# Altium PCB msp430最小系统.PcbDoc (part 2 of 3)
Units mm, origin at the board's own origin, x right, y up, seen from the top; angles counter-clockwise.
Board outline 152.4 x 101.6 mm, 2 copper layers (Top Layer, Bottom Layer); 67 components, 101 nets, 330 pads, 20 vias.
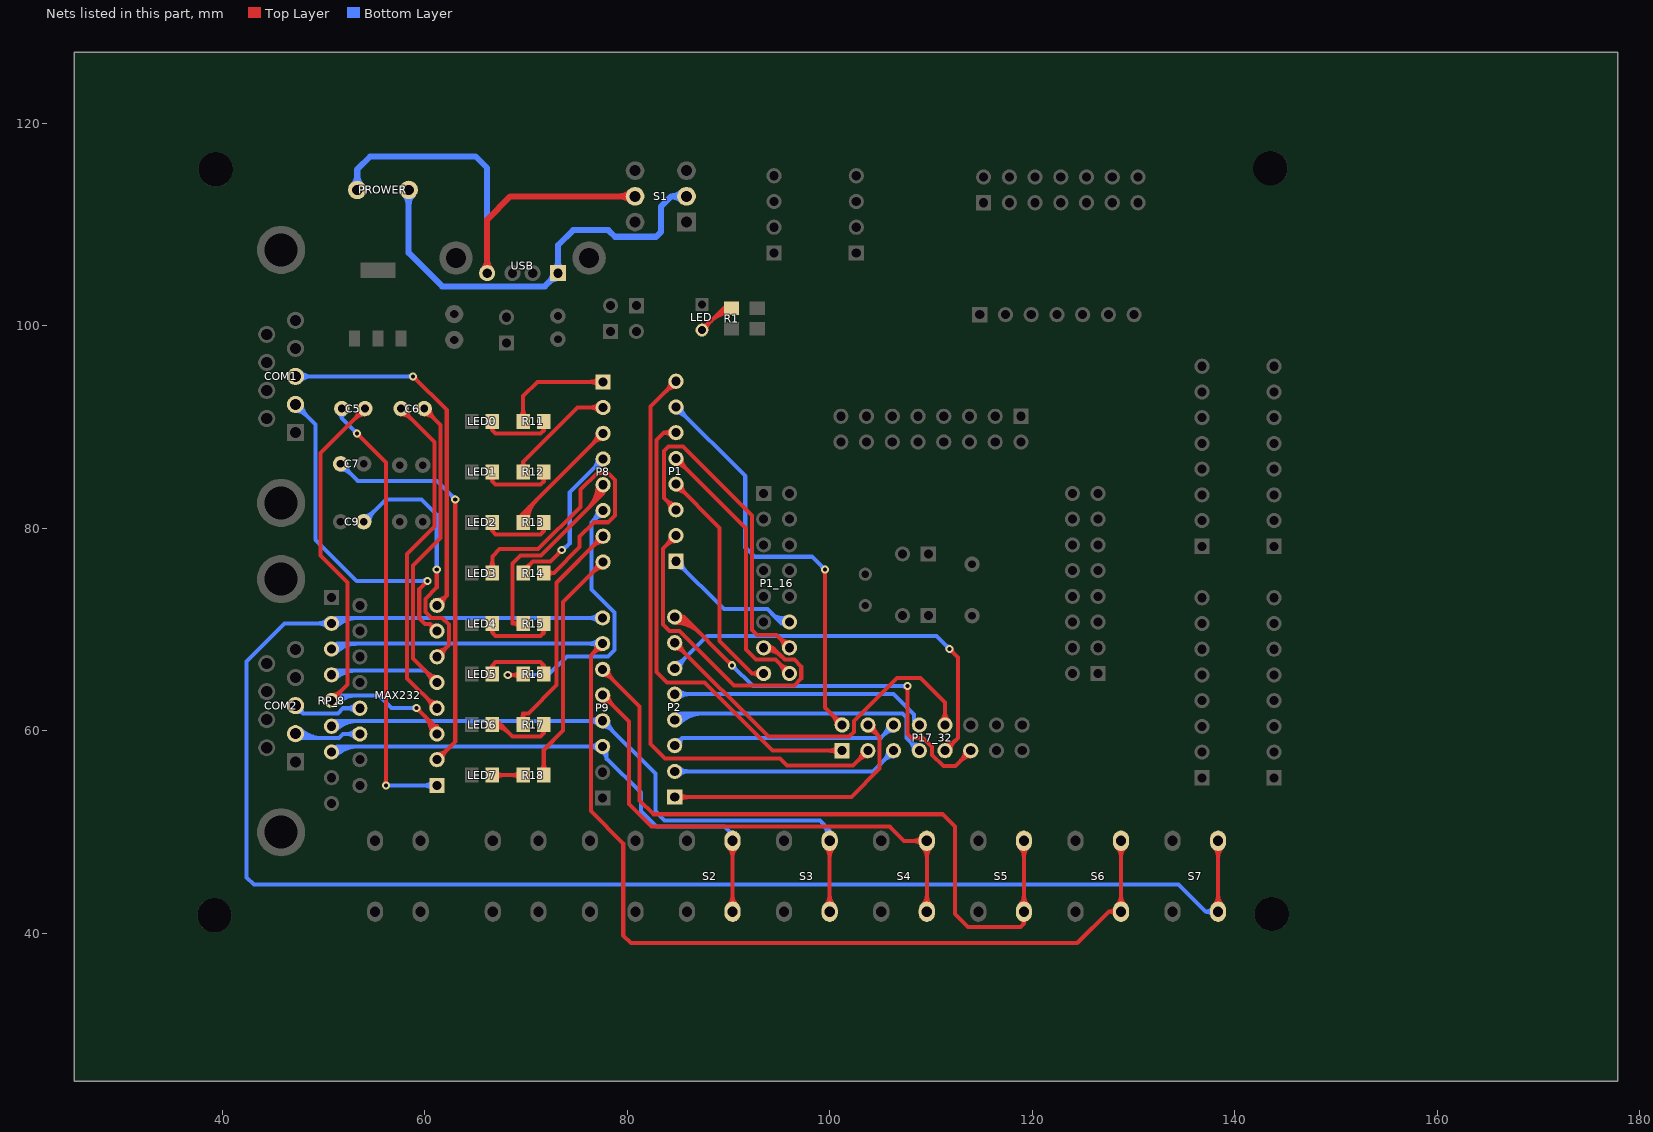
[diagram p2: the nets of this part, all layers, seen from the top]

## Via types
v1: diameter 0.8, hole 0.4, Top Layer to Bottom Layer, 20 vias

## Nets (pads, with @x,y where several pads share a name; then routed paths per layer and width w, separated by ;. In a path a pad name is that pad's centre, name@x,y a point inside that pad or via, vN(x,y) a via of type N, cw(c..) or ccw(c..) an arc to the next point about the centre after c; other vN are vias at no path point) (continued)
Net3_2: P9.3 RP_8.7 S2.2 | length 83.6
  Top Layer w0.4: S2.2@90.401,42.141 S2.2@90.401,49.141 ; 90.401,43.79 cw(c88.952,43.79) 89.976,42.765 ccw(c88.952,43.79) 90.401,43.79 ; 90.401,43.79 ccw(c91.849,43.79) 90.825,42.765 cw(c91.849,43.79) 90.401,43.79 ; 90.401,47.492 cw(c91.849,47.492) 90.825,48.517 ccw(c91.849,47.492) 90.401,47.492 ; 90.401,47.492 ccw(c88.952,47.492) 89.976,48.517 cw(c88.952,47.492) 90.401,47.492
  Bottom Layer w0.4: RP_8.7@50.8,57.912 51.339,58.451 ; S2.2@90.401,49.141 90.401,49.733 89.593,50.541 82.865,50.541 81.336,52.07 81.336,53.903 77.953,57.286 77.953,58.451 P9.3@77.574,58.451 51.339,58.451 ; 51.339,58.451 cw(c51.16,58.63) 51.046,58.404 ccw(c51.16,58.63) 51.339,58.451 ; 51.339,58.451 ccw(c51.518,58.272) 51.292,58.158 cw(c51.518,58.272) 51.339,58.451 ; 76.246,58.451 cw(c76.246,57.123) 77.185,58.062 ccw(c76.246,57.123) 76.246,58.451 ; 76.246,58.451 ccw(c76.246,59.779) 77.185,58.84 cw(c76.246,59.779) 76.246,58.451 ; RP_8.7@50.623,58.089 cw(c51.498,57.214) 51.498,58.451 ccw(c51.498,57.214) RP_8.7@50.623,58.089 ; RP_8.7@50.906,57.806 cw(c52.463,56.249) 52.463,58.451 ccw(c52.463,56.249) RP_8.7@50.906,57.806 ; RP_8.7@51.189,57.523 cw(c53.429,55.283) 53.429,58.451 ccw(c53.429,55.283) RP_8.7@51.189,57.523 ; P9.3@77.426,57.921 cw(c77.231,57.226) 77.953,57.226 ccw(c77.231,57.226) P9.3@77.426,57.921 ; P9.3@77.534,58.307 cw(c77.379,57.754) 77.953,57.754 ccw(c77.379,57.754) P9.3@77.534,58.307 ; 89.944,50.19 cw(c89.285,49.531) 90.204,49.375 ccw(c89.285,49.531) 89.944,50.19 ; 90.046,50.088 ccw(c90.401,50.443) 90.401,49.941 cw(c90.401,50.443) 90.046,50.088
Net4_2: P9.4 RP_8.6 S3.2 | length 100.2
  Top Layer w0.4: S3.2@99.989,42.141 S3.2@99.989,49.141 ; 99.989,43.79 cw(c98.541,43.79) 99.565,42.765 ccw(c98.541,43.79) 99.989,43.79 ; 99.989,43.79 ccw(c101.438,43.79) 100.413,42.765 cw(c101.438,43.79) 99.989,43.79 ; 99.989,47.492 cw(c101.438,47.492) 100.413,48.517 ccw(c101.438,47.492) 99.989,47.492 ; 99.989,47.492 ccw(c98.541,47.492) 99.565,48.517 cw(c98.541,47.492) 99.989,47.492
  Bottom Layer w0.4: RP_8.6@50.8,60.452 51.339,60.991 ; S3.2@99.989,49.141 99.989,50.165 ; 51.339,60.991 cw(c51.16,61.17) 51.046,60.944 ccw(c51.16,61.17) 51.339,60.991 ; 51.339,60.991 ccw(c51.518,60.812) 51.292,60.698 cw(c51.518,60.812) 51.339,60.991 ; 51.339,60.991 P9.4@77.574,60.991 82.768,55.797 82.768,52.07 83.697,51.141 99.013,51.141 99.989,50.165 ; 76.246,60.991 cw(c76.246,59.663) 77.185,60.602 ccw(c76.246,59.663) 76.246,60.991 ; 76.246,60.991 ccw(c76.246,62.319) 77.185,61.38 cw(c76.246,62.319) 76.246,60.991 ; 78.513,60.052 cw(c79.452,60.991) 78.124,60.991 ccw(c79.452,60.991) 78.513,60.052 ; 78.513,60.052 ccw(c77.574,59.113) 77.574,60.441 cw(c77.574,59.113) 78.513,60.052 ; 99.989,50.165 cw(c99.723,50.165) 99.805,49.912 ccw(c99.723,50.165) 99.989,50.165 ; 99.989,50.165 ccw(c100.255,50.165) 100.173,49.912 cw(c100.255,50.165) 99.989,50.165 ; RP_8.6@50.623,60.629 cw(c51.498,59.754) 51.498,60.991 ccw(c51.498,59.754) RP_8.6@50.623,60.629 ; RP_8.6@50.906,60.346 cw(c52.463,58.789) 52.463,60.991 ccw(c52.463,58.789) RP_8.6@50.906,60.346 ; RP_8.6@51.189,60.063 cw(c53.429,57.823) 53.429,60.991 ccw(c53.429,57.823) RP_8.6@51.189,60.063 ; 99.21,50.944 cw(c97.793,49.527) 99.79,49.358 ccw(c97.793,49.527) 99.21,50.944 ; 99.819,50.335 cw(c98.915,49.432) 100.188,49.324 ccw(c98.915,49.432) 99.819,50.335
Net5_2: P9.5 S4.2 | length 67.6
  Top Layer w0.4: P9.5@77.574,63.531 80.162,60.943 80.162,52.757 82.374,50.546 105.918,50.546 107.34,49.124 S4.2@109.578,49.124 ; S4.2@109.578,42.141 S4.2@109.578,49.124 ; S4.2@109.578,49.141 S4.2@109.578,49.124 ; 78.513,62.592 cw(c79.452,63.531) 78.124,63.531 ccw(c79.452,63.531) 78.513,62.592 ; 78.513,62.592 ccw(c77.574,61.653) 77.574,62.981 cw(c77.574,61.653) 78.513,62.592 ; 109.578,43.79 cw(c108.129,43.79) 109.153,42.765 ccw(c108.129,43.79) 109.578,43.79 ; 109.578,43.79 ccw(c111.026,43.79) 110.002,42.765 cw(c111.026,43.79) 109.578,43.79 ; 109.578,47.492 cw(c111.026,47.492) 110.002,48.517 ccw(c111.026,47.492) 109.578,47.492 ; 109.578,47.492 ccw(c108.129,47.492) 109.153,48.517 cw(c108.129,47.492) 109.578,47.492 ; 108.087,49.124 ccw(c108.087,50.632) 109.153,49.565 cw(c108.087,50.632) 108.087,49.124 ; 108.171,49.124 cw(c108.171,47.735) 109.153,48.717 ccw(c108.171,47.735) 108.171,49.124
Net6_2: P9.6 S5.2 | length 86.4
  Top Layer w0.4: P9.6@77.574,66.071 81.229,62.416 81.229,53.137 82.601,51.765 111.15,51.765 112.37,50.546 112.37,41.935 113.665,40.64 118.849,40.64 119.166,40.957 ; S5.2@119.166,49.141 S5.2@119.166,42.141 119.166,40.957 ; 78.513,65.132 cw(c79.452,66.071) 78.124,66.071 ccw(c79.452,66.071) 78.513,65.132 ; 78.513,65.132 ccw(c77.574,64.193) 77.574,65.521 cw(c77.574,64.193) 78.513,65.132 ; 119.166,40.958 cw(c119.672,40.958) 119.441,41.407 ccw(c119.672,40.958) 119.166,40.958 ; 119.166,40.958 ccw(c118.66,40.958) 118.892,41.407 cw(c118.66,40.958) 119.166,40.958 ; 119.166,43.79 cw(c117.718,43.79) 118.742,42.765 ccw(c117.718,43.79) 119.166,43.79 ; 119.166,43.79 ccw(c120.615,43.79) 119.59,42.765 cw(c120.615,43.79) 119.166,43.79 ; 119.166,47.492 cw(c120.615,47.492) 119.59,48.517 ccw(c120.615,47.492) 119.166,47.492 ; 119.166,47.492 ccw(c117.718,47.492) 118.742,48.517 cw(c117.718,47.492) 119.166,47.492
Net7_2: P9.7 RP_8.3 S6.2 | length 147.8
  Top Layer w0.4: P9.7@77.574,68.611 76.422,67.459 76.422,52.07 79.604,48.888 79.604,39.802 80.366,39.04 124.435,39.04 127.559,42.164 ; S6.2@128.755,42.141 S6.2@128.755,42.164 ; S6.2@128.755,49.141 S6.2@128.755,42.164 ; 76.635,67.672 cw(c77.574,66.733) 77.574,68.061 ccw(c77.574,66.733) 76.635,67.672 ; 76.635,67.672 ccw(c75.696,68.611) 77.024,68.611 cw(c75.696,68.611) 76.635,67.672 ; 127.559,42.164 cw(c127.559,41.305) 128.263,41.797 ccw(c127.559,41.305) 127.559,42.164 ; 127.559,42.164 ccw(c127.559,43.092) 128.285,42.514 cw(c127.559,43.092) 127.559,42.164 ; 127.559,42.164 S6.2@128.755,42.164 ; 128.755,43.79 cw(c127.306,43.79) 128.33,42.765 ccw(c127.306,43.79) 128.755,43.79 ; 128.755,43.79 ccw(c130.203,43.79) 129.179,42.765 cw(c130.203,43.79) 128.755,43.79 ; 128.755,47.492 cw(c130.203,47.492) 129.179,48.517 ccw(c130.203,47.492) 128.755,47.492 ; 128.755,47.492 ccw(c127.306,47.492) 128.33,48.517 cw(c127.306,47.492) 128.755,47.492
  Bottom Layer w0.4: RP_8.3@50.8,68.072 51.339,68.611 ; P9.7@77.574,68.611 51.339,68.611 ; 51.339,68.611 cw(c51.16,68.79) 51.046,68.564 ccw(c51.16,68.79) 51.339,68.611 ; 51.339,68.611 ccw(c51.518,68.432) 51.292,68.318 cw(c51.518,68.432) 51.339,68.611 ; 76.246,68.611 cw(c76.246,67.283) 77.185,68.222 ccw(c76.246,67.283) 76.246,68.611 ; 76.246,68.611 ccw(c76.246,69.939) 77.185,69 cw(c76.246,69.939) 76.246,68.611 ; RP_8.3@50.623,68.249 cw(c51.498,67.374) 51.498,68.611 ccw(c51.498,67.374) RP_8.3@50.623,68.249 ; RP_8.3@50.906,67.966 cw(c52.463,66.409) 52.463,68.611 ccw(c52.463,66.409) RP_8.3@50.906,67.966 ; RP_8.3@51.189,67.683 cw(c53.429,65.443) 53.429,68.611 ccw(c53.429,65.443) RP_8.3@51.189,67.683
Net8_2: P9.8 RP_8.2 S7.2 | length 195.3
  Top Layer w0.4: S7.2@138.343,42.141 S7.2@138.343,49.141 ; 138.343,43.79 cw(c136.895,43.79) 137.919,42.765 ccw(c136.895,43.79) 138.343,43.79 ; 138.343,43.79 ccw(c139.792,43.79) 138.767,42.765 cw(c139.792,43.79) 138.343,43.79 ; 138.343,47.492 cw(c139.792,47.492) 138.767,48.517 ccw(c139.792,47.492) 138.343,47.492 ; 138.343,47.492 ccw(c136.895,47.492) 137.919,48.517 cw(c136.895,47.492) 138.343,47.492
  Bottom Layer w0.4: P9.8@77.574,71.151 51.339,71.151 ; S7.2@138.343,42.141 138.343,42.139 137.084,42.139 ; 49.472,70.612 cw(c49.472,69.284) 50.411,70.223 ccw(c49.472,69.284) 49.472,70.612 ; 49.472,70.612 ccw(c49.472,71.94) 50.411,71.001 cw(c49.472,71.94) 49.472,70.612 ; 51.339,71.151 cw(c51.16,71.33) 51.046,71.104 ccw(c51.16,71.33) 51.339,71.151 ; 51.339,71.151 ccw(c51.518,70.972) 51.292,70.858 cw(c51.518,70.972) 51.339,71.151 ; 51.339,71.151 RP_8.2@50.8,70.612 46.177,70.612 42.418,66.853 42.418,45.517 43.129,44.806 134.417,44.806 137.084,42.139 ; 76.246,71.151 cw(c76.246,69.823) 77.185,70.762 ccw(c76.246,69.823) 76.246,71.151 ; 76.246,71.151 ccw(c76.246,72.479) 77.185,71.54 cw(c76.246,72.479) 76.246,71.151 ; 137.084,42.139 cw(c137.084,41.113) 137.878,41.762 ccw(c137.084,41.113) 137.084,42.139 ; 137.084,42.139 ccw(c137.084,43.156) 137.876,42.518 cw(c137.084,43.156) 137.084,42.139 ; RP_8.2@50.623,70.789 cw(c51.498,69.914) 51.498,71.151 ccw(c51.498,69.914) RP_8.2@50.623,70.789 ; RP_8.2@50.906,70.506 cw(c52.463,68.949) 52.463,71.151 ccw(c52.463,68.949) RP_8.2@50.906,70.506 ; RP_8.2@51.189,70.223 cw(c53.429,67.983) 53.429,71.151 ccw(c53.429,67.983) RP_8.2@51.189,70.223
NetC5_1: C5.1 MAX232.1 | length 56.6
  Top Layer w0.4: v1(53.315,89.357) 56.159,86.512 v1(56.159,54.61) ; 53.656,89.016 cw(c53.997,89.357) 53.515,89.357 ccw(c53.997,89.357) 53.656,89.016 ; 53.656,89.016 ccw(c53.315,88.674) 53.315,89.157 cw(c53.315,88.674) 53.656,89.016 ; 56.159,55.093 cw(c55.677,55.093) 56.018,54.751 ccw(c55.677,55.093) 56.159,55.093 ; 56.159,55.093 ccw(c56.642,55.093) 56.301,54.751 cw(c56.642,55.093) 56.159,55.093
  Bottom Layer w0.4: C5.1@51.816,91.821 51.816,90.856 ; v1(53.315,89.357) 51.816,90.856 ; v1(56.159,54.61) MAX232.1@61.214,54.61 ; 51.816,90.856 cw(c52.364,90.856) 52.093,91.332 ccw(c52.364,90.856) 51.816,90.856 ; 51.816,90.856 ccw(c51.268,90.856) 51.539,91.332 cw(c51.268,90.856) 51.816,90.856 ; 52.973,89.699 cw(c52.632,89.357) 53.115,89.357 ccw(c52.632,89.357) 52.973,89.699 ; 52.973,89.699 ccw(c53.315,90.04) 53.315,89.557 cw(c53.315,90.04) 52.973,89.699 ; 56.642,54.61 cw(c56.642,55.093) 56.301,54.751 ccw(c56.642,55.093) 56.642,54.61 ; 56.642,54.61 ccw(c56.642,54.127) 56.301,54.469 cw(c56.642,54.127) 56.642,54.61 ; 59.886,54.61 cw(c59.886,53.282) 60.825,54.221 ccw(c59.886,53.282) 59.886,54.61 ; 59.886,54.61 ccw(c59.886,55.938) 60.825,54.999 cw(c59.886,55.938) 59.886,54.61
NetC5_2: C5.2 MAX232.3 RP_8.5 | length 77.8
  Top Layer w0.4: RP_8.5@50.8,62.992 52.368,64.56 52.368,74.632 49.708,77.292 49.708,87.427 C5.2@54.102,91.821 ; v1(59.207,62.255) 60.985,60.477 61.214,60.477 ; MAX232.3@61.214,59.69 61.214,60.477 ; 51.739,63.931 cw(c50.8,64.87) 50.8,63.542 ccw(c50.8,64.87) 51.739,63.931 ; 51.739,63.931 ccw(c52.678,62.992) 51.35,62.992 cw(c52.678,62.992) 51.739,63.931 ; 53.143,90.862 cw(c54.102,89.902) 54.102,91.259 ccw(c54.102,89.902) 53.143,90.862 ; 53.143,90.862 ccw(c52.183,91.821) 53.54,91.821 cw(c52.183,91.821) 53.143,90.862 ; 59.549,61.914 cw(c59.89,62.255) 59.407,62.255 ccw(c59.89,62.255) 59.549,61.914 ; 59.549,61.914 ccw(c59.207,61.573) 59.207,62.055 cw(c59.207,61.573) 59.549,61.914 ; 61.214,60.477 cw(c60.925,60.477) 61.025,60.206 ccw(c60.925,60.477) 61.214,60.477 ; 61.214,60.477 ccw(c61.503,60.477) 61.403,60.206 cw(c61.503,60.477) 61.214,60.477 ; 59.88,61.583 cw(c57.987,59.69) 60.664,59.69 ccw(c57.987,59.69) 59.88,61.583 ; 60.563,60.9 cw(c59.353,59.69) 61.064,59.69 ccw(c59.353,59.69) 60.563,60.9 ; 60.706,60.757 cw(c60.297,60.348) 60.767,60.011 ccw(c60.297,60.348) 60.706,60.757 ; 61.039,60.424 cw(c60.685,60.069) 61.092,59.777 ccw(c60.685,60.069) 61.039,60.424
  Bottom Layer w0.4: RP_8.5@50.8,62.992 51.308,63.5 55.499,63.5 56.744,62.255 v1(59.207,62.255) ; 58.725,62.255 cw(c58.725,61.773) 59.066,62.114 ccw(c58.725,61.773) 58.725,62.255 ; 58.725,62.255 ccw(c58.725,62.738) 59.066,62.397 cw(c58.725,62.738) 58.725,62.255 ; RP_8.5@50.623,63.169 cw(c51.423,62.369) 51.423,63.5 ccw(c51.423,62.369) RP_8.5@50.623,63.169 ; RP_8.5@50.906,62.886 cw(c52.389,61.403) 52.389,63.5 ccw(c52.389,61.403) RP_8.5@50.906,62.886 ; RP_8.5@51.189,62.603 cw(c53.354,60.438) 53.354,63.5 ccw(c53.354,60.438) RP_8.5@51.189,62.603
NetC6_1: C6.1 MAX232.4 | length 41.7
  Top Layer w0.4: C6.1@57.658,91.821 60.979,88.5 60.979,80.156 58.264,77.441 58.264,65.18 MAX232.4@61.214,62.23 ; 58.617,90.862 cw(c59.577,91.821) 58.22,91.821 ccw(c59.577,91.821) 58.617,90.862 ; 58.617,90.862 ccw(c57.658,89.902) 57.658,91.259 cw(c57.658,89.902) 58.617,90.862 ; 60.275,63.169 cw(c59.336,62.23) 60.664,62.23 ccw(c59.336,62.23) 60.275,63.169 ; 60.275,63.169 ccw(c61.214,64.108) 61.214,62.78 cw(c61.214,64.108) 60.275,63.169
NetC6_2: C6.2 MAX232.5 RP_8.4 | length 60.7
  Top Layer w0.4: C6.2@59.944,91.821 61.579,90.186 61.579,79.057 58.864,76.342 58.864,67.12 MAX232.5@61.214,64.77 ; 60.275,65.709 cw(c59.336,64.77) 60.664,64.77 ccw(c59.336,64.77) 60.275,65.709 ; 60.275,65.709 ccw(c61.214,66.648) 61.214,65.32 cw(c61.214,66.648) 60.275,65.709 ; 60.903,90.862 cw(c61.863,91.821) 60.506,91.821 ccw(c61.863,91.821) 60.903,90.862 ; 60.903,90.862 ccw(c59.944,89.902) 59.944,91.259 cw(c59.944,89.902) 60.903,90.862
  Bottom Layer w0.4: RP_8.4@50.8,65.532 50.8,65.938 60.046,65.938 MAX232.5@61.214,64.77 ; 60.275,65.709 cw(c59.336,64.77) 60.664,64.77 ccw(c59.336,64.77) 60.275,65.709 ; 60.275,65.709 ccw(c61.214,66.648) 61.214,65.32 cw(c61.214,66.648) 60.275,65.709 ; RP_8.4@50.906,65.426 cw(c52.143,64.189) 52.143,65.938 ccw(c52.143,64.189) RP_8.4@50.906,65.426 ; RP_8.4@51.189,65.143 cw(c53.109,63.223) 53.109,65.938 ccw(c53.109,63.223) RP_8.4@51.189,65.143
NetC7_1: C7.1 MAX232.2 | length 50.7
  Top Layer w0.4: MAX232.2@61.214,57.15 63.017,58.953 v1(63.017,82.86) ; 62.153,58.089 cw(c61.214,59.028) 61.214,57.7 ccw(c61.214,59.028) 62.153,58.089 ; 62.153,58.089 ccw(c63.092,57.15) 61.764,57.15 cw(c63.092,57.15) 62.153,58.089 ; 63.017,82.377 cw(c63.5,82.377) 63.159,82.719 ccw(c63.5,82.377) 63.017,82.377 ; 63.017,82.377 ccw(c62.535,82.377) 62.876,82.719 cw(c62.535,82.377) 63.017,82.377
  Bottom Layer w0.4: C7.1@51.689,86.36 53.391,84.658 61.219,84.658 v1(63.017,82.86) ; 52.648,85.401 cw(c53.608,86.36) 52.251,86.36 ccw(c53.608,86.36) 52.648,85.401 ; 52.648,85.401 ccw(c51.689,84.441) 51.689,85.798 cw(c51.689,84.441) 52.648,85.401 ; 62.676,83.202 cw(c62.335,82.86) 62.817,82.86 ccw(c62.335,82.86) 62.676,83.202 ; 62.676,83.202 ccw(c63.017,83.543) 63.017,83.06 cw(c63.017,83.543) 62.676,83.202
NetC9_2: C9.2 MAX232.6 | length 36.8
  Top Layer w0.4: v1(61.189,75.921) 61.189,74.15 60.064,73.025 60.064,71.737 60.664,71.137 61.73,71.137 62.382,70.485 62.382,68.478 MAX232.6@61.214,67.31 ; 61.189,75.438 cw(c61.671,75.438) 61.33,75.779 ccw(c61.671,75.438) 61.189,75.438 ; 61.189,75.438 ccw(c60.706,75.438) 61.047,75.779 cw(c60.706,75.438) 61.189,75.438 ; 62.153,68.249 cw(c61.214,69.188) 61.214,67.86 ccw(c61.214,69.188) 62.153,68.249 ; 62.153,68.249 ccw(c63.092,67.31) 61.764,67.31 cw(c63.092,67.31) 62.153,68.249
  Bottom Layer w0.4: C9.2@53.975,80.645 56.185,82.855 59.69,82.855 61.189,81.356 v1(61.189,75.921) ; 54.934,81.604 cw(c53.975,82.564) 53.975,81.207 ccw(c53.975,82.564) 54.934,81.604 ; 54.934,81.604 ccw(c55.894,80.645) 54.537,80.645 cw(c55.894,80.645) 54.934,81.604 ; 61.189,76.403 cw(c60.706,76.403) 61.047,76.062 ccw(c60.706,76.403) 61.189,76.403 ; 61.189,76.403 ccw(c61.671,76.403) 61.33,76.062 cw(c61.671,76.403) 61.189,76.403
NetCOM1_2: COM1.2 MAX232.7 | length 43.6
  Top Layer w0.4: v1(60.274,74.803) 59.464,73.993 59.464,71.081 60.008,70.537 60.527,70.537 ; MAX232.7@61.214,69.85 60.527,70.537 ; 59.933,74.462 cw(c60.274,74.12) 60.274,74.603 ccw(c60.274,74.12) 59.933,74.462 ; 59.933,74.462 ccw(c59.591,74.803) 60.074,74.803 cw(c59.591,74.803) 59.933,74.462 ; 60.527,70.537 cw(c60.115,70.125) 60.68,69.983 ccw(c60.115,70.125) 60.527,70.537 ; 60.527,70.537 ccw(c60.939,70.949) 61.081,70.384 cw(c60.939,70.949) 60.527,70.537
  Bottom Layer w0.4: COM1.2@47.242,92.226 49.225,90.243 49.225,78.867 53.289,74.803 v1(60.274,74.803) ; 48.343,91.125 cw(c49.444,92.226) 47.887,92.226 ccw(c49.444,92.226) 48.343,91.125 ; 48.343,91.125 ccw(c47.242,90.024) 47.242,91.581 cw(c47.242,90.024) 48.343,91.125 ; 59.791,74.803 cw(c59.791,74.32) 60.133,74.662 ccw(c59.791,74.32) 59.791,74.803 ; 59.791,74.803 ccw(c59.791,75.286) 60.133,74.944 cw(c59.791,75.286) 59.791,74.803
NetCOM1_3: COM1.3 MAX232.8 | length 48.1
  Top Layer w0.4: v1(58.852,94.996) 62.179,91.669 62.179,73.355 MAX232.8@61.214,72.39 ; 59.193,94.655 cw(c59.535,94.996) 59.052,94.996 ccw(c59.535,94.996) 59.193,94.655 ; 59.193,94.655 ccw(c58.852,94.313) 58.852,94.796 cw(c58.852,94.313) 59.193,94.655 ; 62.153,73.329 cw(c61.214,74.268) 61.214,72.94 ccw(c61.214,74.268) 62.153,73.329 ; 62.153,73.329 ccw(c63.092,72.39) 61.764,72.39 cw(c63.092,72.39) 62.153,73.329
  Bottom Layer w0.4: COM1.3@47.242,94.996 v1(58.852,94.996) ; 48.799,94.996 cw(c48.799,96.553) 47.698,95.452 ccw(c48.799,96.553) 48.799,94.996 ; 48.799,94.996 ccw(c48.799,93.439) 47.698,94.54 cw(c48.799,93.439) 48.799,94.996 ; 58.369,94.996 cw(c58.369,94.513) 58.71,94.855 ccw(c58.369,94.513) 58.369,94.996 ; 58.369,94.996 ccw(c58.369,95.479) 58.71,95.137 cw(c58.369,95.479) 58.369,94.996
NetCOM2_2: COM2.2 MAX232.14 | length 19.1
  Bottom Layer w0.4: COM2.2@47.242,59.714 47.242,59.284 51.537,59.284 51.943,59.69 MAX232.14@53.594,59.69 ; 52.266,59.69 cw(c52.266,58.362) 53.205,59.301 ccw(c52.266,58.362) 52.266,59.69 ; 52.266,59.69 ccw(c52.266,61.018) 53.205,60.079 cw(c52.266,61.018) 52.266,59.69 ; COM2.2@47.415,59.887 ccw(c48.873,61.344) 48.873,59.284 cw(c48.873,61.344) COM2.2@47.415,59.887 ; COM2.2@47.698,60.17 ccw(c49.838,62.31) 49.838,59.284 cw(c49.838,62.31) COM2.2@47.698,60.17
NetCOM2_3: COM2.3 MAX232.13 | length 13.5
  Bottom Layer w0.4: COM2.3@47.242,62.484 48.004,61.722 ; MAX232.13@53.594,62.23 51.943,62.23 51.435,61.722 48.004,61.722 ; 48.004,61.722 cw(c48.412,62.13) 47.859,62.298 ccw(c48.412,62.13) 48.004,61.722 ; 48.004,61.722 ccw(c47.596,61.314) 47.429,61.867 cw(c47.596,61.314) 48.004,61.722 ; 52.266,62.23 cw(c52.266,60.902) 53.205,61.841 ccw(c52.266,60.902) 52.266,62.23 ; 52.266,62.23 ccw(c52.266,63.558) 53.205,62.619 cw(c52.266,63.558) 52.266,62.23
NetD10_2: LED0.2 R11.2 | length 12.7
  Top Layer w0.4: LED0.2@66.675,90.551 66.675,89.675 ; R11.2@71.755,90.551 71.755,89.675 ; LED0.2@66.451,90.06 cw(c66.231,89.675) 66.675,89.675 ; LED0.2@66.451,90.06 cw(c66.231,89.675) 66.675,89.675 ; LED0.2@66.451,90.06 cw(c66.231,89.675) 66.675,89.675 ; LED0.2@66.451,90.06 cw(c66.231,89.675) 66.675,89.675 ; 66.675,89.675 cw(c67.119,89.675) LED0.2@66.899,90.06 ; 66.675,89.675 cw(c67.119,89.675) LED0.2@66.899,90.06 ; 66.675,89.675 cw(c67.119,89.675) LED0.2@66.899,90.06 ; 66.675,89.675 cw(c67.119,89.675) LED0.2@66.899,90.06 ; 66.675,89.675 66.992,89.357 71.438,89.357 71.755,89.675 ; 71.755,89.675 cw(c72.199,89.675) 71.979,90.06 ccw(c72.199,89.675) 71.755,89.675 ; 71.755,89.675 ccw(c71.311,89.675) 71.531,90.06 cw(c71.311,89.675) 71.755,89.675
NetD11_2: LED1.2 R12.2 | length 13.8
  Top Layer w0.4: LED1.2@66.675,85.562 66.675,84.62 ; R12.2@71.755,85.562 71.755,84.62 ; LED1.2@66.425,85.087 cw(c66.113,84.62) 66.675,84.62 ; LED1.2@66.425,85.087 cw(c66.113,84.62) 66.675,84.62 ; LED1.2@66.425,85.087 cw(c66.113,84.62) 66.675,84.62 ; LED1.2@66.425,85.087 cw(c66.113,84.62) 66.675,84.62 ; 66.675,84.62 cw(c67.237,84.62) LED1.2@66.925,85.087 ; 66.675,84.62 cw(c67.237,84.62) LED1.2@66.925,85.087 ; 66.675,84.62 cw(c67.237,84.62) LED1.2@66.925,85.087 ; 66.675,84.62 cw(c67.237,84.62) LED1.2@66.925,85.087 ; 66.675,84.62 66.992,84.303 71.438,84.303 71.755,84.62 ; 71.755,84.62 cw(c72.317,84.62) 72.005,85.087 ccw(c72.317,84.62) 71.755,84.62 ; 71.755,84.62 ccw(c71.193,84.62) 71.505,85.087 cw(c71.193,84.62) 71.755,84.62
NetD12_2: LED2.2 R13.2 | length 12.3
  Top Layer w0.4: LED2.2@66.675,80.572 66.675,79.718 ; R13.2@71.755,80.572 71.755,79.718 ; LED2.2@66.461,80.076 cw(c66.268,79.718) 66.675,79.718 ; LED2.2@66.461,80.076 cw(c66.268,79.718) 66.675,79.718 ; LED2.2@66.461,80.076 cw(c66.268,79.718) 66.675,79.718 ; LED2.2@66.461,80.076 cw(c66.268,79.718) 66.675,79.718 ; 66.675,79.718 cw(c67.082,79.718) LED2.2@66.889,80.076 ; 66.675,79.718 cw(c67.082,79.718) LED2.2@66.889,80.076 ; 66.675,79.718 cw(c67.082,79.718) LED2.2@66.889,80.076 ; 66.675,79.718 cw(c67.082,79.718) LED2.2@66.889,80.076 ; 66.675,79.718 66.992,79.4 71.438,79.4 71.755,79.718 ; 71.755,79.718 cw(c72.162,79.718) 71.969,80.076 ccw(c72.162,79.718) 71.755,79.718 ; 71.755,79.718 ccw(c71.348,79.718) 71.541,80.076 cw(c71.348,79.718) 71.755,79.718
NetD13_2: LED3.2 R14.2 | length 38.3
  Top Layer w0.4: LED3.2@66.675,75.583 66.675,77.216 67.392,77.933 71.202,77.933 75.392,82.123 75.392,83.82 77.043,85.471 78.105,85.471 78.791,84.785 78.791,81.28 78.105,80.594 76.708,80.594 75.292,79.179 75.292,78.13 72.746,75.583 ; R14.2@71.755,75.583 72.746,75.583 ; 66.675,76.77 cw(c65.589,76.77) 66.357,76.001 ccw(c65.589,76.77) 66.675,76.77 ; 66.675,76.77 ccw(c67.761,76.77) 66.993,76.001 cw(c67.761,76.77) 66.675,76.77 ; 72.746,75.583 cw(c72.746,76.448) 72.094,75.879 ccw(c72.746,76.448) 72.746,75.583 ; 72.746,75.583 ccw(c72.746,74.718) 72.094,75.287 cw(c72.746,74.718) 72.746,75.583
NetD14_2: LED4.2 R15.2 | length 13.3
  Top Layer w0.4: LED4.2@66.675,70.594 66.675,69.685 ; R15.2@71.755,70.594 71.755,69.685 ; LED4.2@66.438,70.112 cw(c66.173,69.685) 66.675,69.685 ; LED4.2@66.438,70.112 cw(c66.173,69.685) 66.675,69.685 ; LED4.2@66.438,70.112 cw(c66.173,69.685) 66.675,69.685 ; LED4.2@66.438,70.112 cw(c66.173,69.685) 66.675,69.685 ; 66.675,69.685 cw(c67.177,69.685) LED4.2@66.912,70.112 ; 66.675,69.685 cw(c67.177,69.685) LED4.2@66.912,70.112 ; 66.675,69.685 cw(c67.177,69.685) LED4.2@66.912,70.112 ; 66.675,69.685 cw(c67.177,69.685) LED4.2@66.912,70.112 ; 66.675,69.685 66.992,69.367 71.438,69.367 71.755,69.685 ; 71.755,69.685 cw(c72.257,69.685) 71.992,70.112 ccw(c72.257,69.685) 71.755,69.685 ; 71.755,69.685 ccw(c71.253,69.685) 71.518,70.112 cw(c71.253,69.685) 71.755,69.685
NetD15_2: LED5.2 R16.2 | length 12.8
  Top Layer w0.4: LED5.2@66.675,65.605 66.675,66.459 ; R16.2@71.755,65.605 71.755,66.472 ; 66.675,66.459 cw(c66.267,66.459) 66.461,66.1 ccw(c66.267,66.459) 66.675,66.459 ; 66.675,66.459 ccw(c67.083,66.459) 66.889,66.1 cw(c67.083,66.459) 66.675,66.459 ; 66.675,66.459 66.992,66.777 71.45,66.777 71.755,66.472 ; 71.755,66.472 cw(c71.326,66.472) 71.535,66.097 ccw(c71.326,66.472) 71.755,66.472 ; 71.755,66.472 ccw(c72.184,66.472) 71.975,66.097 cw(c72.184,66.472) 71.755,66.472 ; 71.499,66.728 cw(c70.836,66.065) 71.708,65.723 ccw(c70.836,66.065) 71.499,66.728
NetD16_2: LED6.2 R17.2 | length 22.6
  Top Layer w0.4: LED6.2@66.675,60.615 67.502,60.615 ; R17.2@71.755,60.615 71.755,59.779 ; 67.502,60.615 cw(c67.502,61.151) 67.053,60.86 ccw(c67.502,61.151) 67.502,60.615 ; 67.502,60.615 ccw(c67.502,60.08) 67.053,60.371 cw(c67.502,60.08) 67.502,60.615 ; 67.502,60.615 68.656,59.461 71.438,59.461 71.755,59.779 ; 71.755,59.779 cw(c72.132,59.779) 71.96,60.115 ccw(c72.132,59.779) 71.755,59.779 ; 71.755,59.779 ccw(c71.378,59.779) 71.55,60.115 cw(c71.378,59.779) 71.755,59.779 ; LED6.2@66.442,60.776 cw(c66.891,60.274) 67.367,60.75 ccw(c66.891,60.274) LED6.2@66.442,60.776 ; LED6.2@66.675,60.465 cw(c66.675,58.106) 68.343,59.774 ccw(c66.675,58.106) LED6.2@66.675,60.465 ; LED6.2@66.675,60.865 cw(c66.675,59.471) 67.661,60.457 ccw(c66.675,59.471) LED6.2@66.675,60.865 ; LED6.2@66.708,60.478 cw(c67.173,59.957) 67.667,60.451 ccw(c67.173,59.957) LED6.2@66.708,60.478 ; LED6.2@66.975,60.18 cw(c67.456,59.641) 67.966,60.152 ccw(c67.456,59.641) LED6.2@66.975,60.18
NetD17_2: LED7.2 R18.2 | length 9.9
  Top Layer w0.4: LED7.2@66.675,55.626 R18.2@69.723,55.626 ; 67.761,55.626 cw(c67.761,56.712) 66.993,55.944 ccw(c67.761,56.712) 67.761,55.626 ; 67.761,55.626 ccw(c67.761,54.54) 66.993,55.308 cw(c67.761,54.54) 67.761,55.626 ; 68.637,55.626 cw(c68.637,54.54) 69.405,55.308 ccw(c68.637,54.54) 68.637,55.626 ; 68.637,55.626 ccw(c68.637,56.712) 69.405,55.944 cw(c68.637,56.712) 68.637,55.626
NetDS1_2: LED.2 R1.2 | length 18.3
  Top Layer w0.4: LED.2@87.376,99.568 89.535,101.727 ; R1.2@90.297,101.727 89.535,101.727 ; 88.119,100.311 cw(c87.376,101.053) 87.376,100.003 ccw(c87.376,101.053) 88.119,100.311 ; 88.119,100.311 ccw(c88.861,99.568) 87.811,99.568 cw(c88.861,99.568) 88.119,100.311 ; 89.535,101.727 cw(c89.535,101.465) 89.779,101.561 ccw(c89.535,101.465) 89.535,101.727 ; 89.535,101.727 ccw(c89.535,101.989) 89.779,101.893 cw(c89.535,101.989) 89.535,101.727 ; 88.299,100.491 cw(c90.197,98.592) 90.197,101.277 ccw(c90.197,98.592) 88.299,100.491 ; 88.982,101.174 cw(c90.197,99.958) 90.197,101.677 ccw(c90.197,99.958) 88.982,101.174 ; 89.204,101.396 cw(c89.548,101.052) 89.885,101.403 ccw(c89.548,101.052) 89.204,101.396 ; 89.492,101.684 cw(c89.831,101.346) 90.162,101.691 ccw(c89.831,101.346) 89.492,101.684
NetP8_1: P8.1 R11.1 | length 18.6
  Top Layer w0.4: R11.1@69.723,90.551 69.723,93.06 71.12,94.457 P8.1@77.62,94.457 ; 69.723,91.737 cw(c68.637,91.737) 69.405,90.969 ccw(c68.637,91.737) 69.723,91.737 ; 69.723,91.737 ccw(c70.809,91.737) 70.041,90.969 cw(c70.809,91.737) 69.723,91.737 ; 76.292,94.457 cw(c76.292,93.129) 77.231,94.068 ccw(c76.292,93.129) 76.292,94.457 ; 76.292,94.457 ccw(c76.292,95.785) 77.231,94.846 cw(c76.292,95.785) 76.292,94.457
NetP8_2: P8.2 R12.1 | length 17.7
  Top Layer w0.4: R12.1@69.723,85.562 69.723,86.538 ; P8.2@77.62,91.917 75.102,91.917 69.723,86.538 ; 69.723,86.538 cw(c69.095,86.538) 69.461,86.027 ccw(c69.095,86.538) 69.723,86.538 ; 69.723,86.538 ccw(c70.351,86.538) 69.985,86.027 cw(c70.351,86.538) 69.723,86.538 ; 76.292,91.917 cw(c76.292,90.589) 77.231,91.528 ccw(c76.292,90.589) 76.292,91.917 ; 76.292,91.917 ccw(c76.292,93.245) 77.231,92.306 cw(c76.292,93.245) 76.292,91.917
NetP8_3: P8.3 R13.1 | length 28
  Top Layer w0.4: R13.1@69.723,80.572 69.723,81.48 ; P8.3@77.62,89.377 69.723,81.48 ; 69.723,81.48 cw(c69.223,81.48) 69.486,81.055 ccw(c69.223,81.48) 69.723,81.48 ; 69.723,81.48 ccw(c70.223,81.48) 69.96,81.055 cw(c70.223,81.48) 69.723,81.48 ; 76.681,88.438 cw(c77.62,87.499) 77.62,88.827 ccw(c77.62,87.499) 76.681,88.438 ; 76.681,88.438 ccw(c75.742,89.377) 77.07,89.377 cw(c75.742,89.377) 76.681,88.438 ; R13.1@69.373,80.672 cw(c70.478,80.672) 69.697,81.454 ccw(c70.478,80.672) R13.1@69.373,80.672 ; R13.1@69.773,80.672 cw(c71.843,80.672) 70.379,82.136 ccw(c71.843,80.672) R13.1@69.773,80.672 ; R13.1@70.173,80.672 cw(c73.209,80.672) 71.062,82.819 ccw(c73.209,80.672) R13.1@70.173,80.672
NetP8_4: P8.4 R14.1 | length 26
  Top Layer w0.4: R14.1@69.723,75.583 69.723,75.768 70.688,76.733 72.415,76.733 v1(73.533,77.851) ; 73.192,77.51 cw(c73.533,77.168) 73.533,77.651 ccw(c73.533,77.168) 73.192,77.51 ; 73.192,77.51 ccw(c72.85,77.851) 73.333,77.851 cw(c72.85,77.851) 73.192,77.51 ; R14.1@69.723,76.133 ccw(c69.723,77.015) 70.346,76.391 cw(c69.723,77.015) R14.1@69.723,76.133 ; R14.1@70.173,75.683 cw(c71.464,75.683) 70.551,76.596 ccw(c71.464,75.683) R14.1@70.173,75.683
  Bottom Layer w0.4: v1(73.533,77.851) 73.66,77.851 74.32,78.511 74.32,83.537 P8.4@77.62,86.837 ; 76.681,85.898 cw(c77.62,84.959) 77.62,86.287 ccw(c77.62,84.959) 76.681,85.898 ; 76.681,85.898 ccw(c75.742,86.837) 77.07,86.837 cw(c75.742,86.837) 76.681,85.898 ; v1@73.533,78.051 ccw(c73.533,78.84) 74.091,78.282 cw(c73.533,78.84) v1@73.533,78.051
NetP8_5: P8.5 R15.1 | length 36.1
  Top Layer w0.4: R15.1@69.723,70.594 68.656,70.594 ; P8.5@77.62,84.297 77.62,83.449 ; 68.656,70.594 cw(c68.656,69.554) 69.401,70.28 ccw(c68.656,69.554) 68.656,70.594 ; 68.656,70.594 ccw(c68.656,71.633) 69.401,70.908 cw(c68.656,71.633) 68.656,70.594 ; 68.656,70.594 68.656,76.517 69.472,77.333 71.504,77.333 77.62,83.449 ; 77.62,83.449 cw(c77.998,83.449) 77.844,83.795 ccw(c77.998,83.449) 77.62,83.449 ; 77.62,83.449 ccw(c77.242,83.449) 77.396,83.795 cw(c77.242,83.449) 77.62,83.449 ; 76.082,81.911 ccw(c73.696,84.297) 77.07,84.297 cw(c73.696,84.297) 76.082,81.911 ; 76.765,82.594 ccw(c75.061,84.297) 77.47,84.297 cw(c75.061,84.297) 76.765,82.594 ; 77.447,83.277 ccw(c76.427,84.297) 77.87,84.297 cw(c76.427,84.297) 77.447,83.277
NetP8_6: P8.6 R16.1 | length 39
  Top Layer w0.4: v1(68.199,65.507) 69.723,65.507 R16.1@69.723,65.605 ; 68.682,65.507 cw(c68.682,65.989) 68.34,65.648 ccw(c68.682,65.989) 68.682,65.507 ; 68.682,65.507 ccw(c68.682,65.024) 68.34,65.365 cw(c68.682,65.024) 68.682,65.507 ; 68.632,65.507 cw(c68.632,64.413) 69.405,65.186 ccw(c68.632,64.413) 68.632,65.507 ; 68.642,65.507 ccw(c68.642,66.586) 69.405,65.823 cw(c68.642,66.586) 68.642,65.507
  Bottom Layer w0.4: v1(68.199,65.507) 72.187,65.507 74.041,67.361 78.105,67.361 78.74,67.996 78.74,71.679 76.454,73.965 76.454,80.591 P8.6@77.62,81.757 ; 68.682,65.507 cw(c68.682,65.989) 68.34,65.648 ccw(c68.682,65.989) 68.682,65.507 ; 68.682,65.507 ccw(c68.682,65.024) 68.34,65.365 cw(c68.682,65.024) 68.682,65.507 ; 76.681,80.818 cw(c77.62,79.879) 77.62,81.207 ccw(c77.62,79.879) 76.681,80.818 ; 76.681,80.818 ccw(c75.742,81.757) 77.07,81.757 cw(c75.742,81.757) 76.681,80.818
NetP8_7: P8.7 R17.1 | length 29.4
  Top Layer w0.4: R17.1@69.723,60.615 69.723,61.722 ; P8.7@77.62,79.217 73.025,74.622 73.025,64.516 70.231,61.722 69.723,61.722 ; 69.723,61.722 cw(c68.822,61.722) 69.423,61.051 ccw(c68.822,61.722) 69.723,61.722 ; 69.723,61.722 ccw(c70.624,61.722) 70.023,61.051 cw(c70.624,61.722) 69.723,61.722 ; 76.681,78.278 cw(c77.62,77.339) 77.62,78.667 ccw(c77.62,77.339) 76.681,78.278 ; 76.681,78.278 ccw(c75.742,79.217) 77.07,79.217 cw(c75.742,79.217) 76.681,78.278
NetP8_8: P8.8 R18.1 | length 31.1
  Top Layer w0.4: R18.1@71.755,55.626 71.755,58.115 73.66,60.02 73.66,72.717 P8.8@77.62,76.677 ; 71.755,56.812 cw(c70.669,56.812) 71.437,56.044 ccw(c70.669,56.812) 71.755,56.812 ; 71.755,56.812 ccw(c72.841,56.812) 72.073,56.044 cw(c72.841,56.812) 71.755,56.812 ; 76.681,75.738 cw(c77.62,74.799) 77.62,76.127 ccw(c77.62,74.799) 76.681,75.738 ; 76.681,75.738 ccw(c75.742,76.677) 77.07,76.677 cw(c75.742,76.677) 76.681,75.738
NetPROWER_1: PROWER.1 S1.1@85.852,112.776 USB.1 | length 59.3
  Bottom Layer w0.6: PROWER.1@58.42,113.411 58.42,107.188 61.715,103.893 71.863,103.893 USB.1@73.163,105.193 73.163,107.95 74.662,109.449 78.13,109.449 78.791,108.788 82.855,108.788 83.312,109.245 83.312,111.76 84.328,112.776 S1.1@85.852,112.776 ; 58.42,111.933 cw(c59.898,111.933) 58.853,112.978 ccw(c59.898,111.933) 58.42,111.933 ; 58.42,111.933 ccw(c56.942,111.933) 57.987,112.978 cw(c56.942,111.933) 58.42,111.933 ; 72.31,104.34 cw(c73.163,103.486) 73.163,104.693 ccw(c73.163,103.486) 72.31,104.34 ; 72.31,104.34 ccw(c71.456,105.193) 72.663,105.193 cw(c71.456,105.193) 72.31,104.34 ; 73.163,106.401 cw(c71.956,106.401) 72.81,105.547 ccw(c71.956,106.401) 73.163,106.401 ; 73.163,106.401 ccw(c74.371,106.401) 73.517,105.547 cw(c74.371,106.401) 73.163,106.401 ; 84.343,112.776 cw(c84.343,111.267) 85.41,112.334 ccw(c84.343,111.267) 84.343,112.776 ; 84.343,112.776 ccw(c84.343,114.285) 85.41,113.218 cw(c84.343,114.285) 84.343,112.776
NetPROWER_2: PROWER.2 S1.5 USB.4 | length 64.4
  Top Layer w0.6: USB.4@66.164,105.193 66.164,110.487 68.453,112.776 S1.5@80.772,112.776 ; 66.164,106.401 cw(c64.956,106.401) 65.81,105.547 ccw(c64.956,106.401) 66.164,106.401 ; 66.164,106.401 ccw(c67.371,106.401) 66.517,105.547 cw(c67.371,106.401) 66.164,106.401 ; 79.263,112.776 cw(c79.263,111.267) 80.33,112.334 ccw(c79.263,111.267) 79.263,112.776 ; 79.263,112.776 ccw(c79.263,114.285) 80.33,113.218 cw(c79.263,114.285) 79.263,112.776
  Bottom Layer w0.6: PROWER.2@53.213,113.665 53.213,113.538 PROWER.2@53.34,113.411 53.34,115.443 54.61,116.713 65.024,116.713 66.164,115.573 USB.4@66.164,105.193 ; 53.34,114.889 cw(c51.862,114.889) 52.907,113.844 ccw(c51.862,114.889) 53.34,114.889 ; 53.34,114.889 ccw(c54.818,114.889) 53.773,113.844 cw(c54.818,114.889) 53.34,114.889 ; 66.164,106.401 cw(c64.956,106.401) 65.81,105.547 ccw(c64.956,106.401) 66.164,106.401 ; 66.164,106.401 ccw(c67.371,106.401) 66.517,105.547 cw(c67.371,106.401) 66.164,106.401
P1_0: P1.1 P1_16.12 | length 28
  Bottom Layer w0.4: P1.1@84.813,76.739 89.543,72.009 93.828,72.009 95.098,70.739 ; P1_16.12@96.012,70.739 95.098,70.739 ; 85.752,75.8 cw(c86.691,76.739) 85.363,76.739 ccw(c86.691,76.739) 85.752,75.8 ; 85.752,75.8 ccw(c84.813,74.861) 84.813,76.189 cw(c84.813,74.861) 85.752,75.8 ; 95.098,70.739 cw(c95.098,70.255) 95.526,70.482 ccw(c95.098,70.255) 95.098,70.739 ; 95.098,70.739 ccw(c95.098,71.223) 95.526,70.996 cw(c95.098,71.223) 95.098,70.739 ; 94.285,71.552 ccw(c95.273,72.54) 95.803,71.248 cw(c95.273,72.54) 94.285,71.552 ; 94.71,71.127 ccw(c95.52,71.937) 95.955,70.878 cw(c95.52,71.937) 94.71,71.127 ; 95.135,70.703 ccw(c95.767,71.335) 96.107,70.508 cw(c95.767,71.335) 95.135,70.703
P1_1: P1.2 P1_16.13 | length 48.6
  Top Layer w0.4: P1.2@84.813,79.279 83.515,77.981 83.515,70.485 84.15,69.85 85.177,69.85 90.536,64.491 96.52,64.491 97.18,65.151 97.18,66.37 96.52,67.031 95.554,67.031 94.386,68.199 ; P1_16.13@93.472,68.199 94.386,68.199 ; 83.874,78.34 cw(c84.813,77.401) 84.813,78.729 ccw(c84.813,77.401) 83.874,78.34 ; 83.874,78.34 ccw(c82.935,79.279) 84.263,79.279 cw(c82.935,79.279) 83.874,78.34 ; 94.386,68.199 cw(c94.386,68.683) 93.958,68.456 ccw(c94.386,68.683) 94.386,68.199 ; 94.386,68.199 ccw(c94.386,67.715) 93.958,67.942 cw(c94.386,67.715) 94.386,68.199 ; P1_16.13@93.472,68.049 cw(c93.472,65.481) 95.288,67.297 ccw(c93.472,65.481) P1_16.13@93.472,68.049 ; P1_16.13@93.472,68.449 cw(c93.472,66.847) 94.605,67.98 ccw(c93.472,66.847) P1_16.13@93.472,68.449 ; P1_16.13@93.57,68.085 cw(c94.033,67.544) 94.537,68.048 ccw(c94.033,67.544) P1_16.13@93.57,68.085 ; P1_16.13@93.83,67.781 cw(c94.315,67.215) 94.842,67.742 ccw(c94.315,67.215) P1_16.13@93.83,67.781
P1_2: P1.3 P1_16.14 | length 42
  Top Layer w0.4: P1.3@84.813,81.819 83.642,82.99 83.642,87.63 84.074,88.062 85.522,88.062 92.322,81.262 92.322,69.959 92.812,69.469 94.742,69.469 P1_16.14@96.012,68.199 ; 83.874,82.758 cw(c82.935,81.819) 84.263,81.819 ccw(c82.935,81.819) 83.874,82.758 ; 83.874,82.758 ccw(c84.813,83.697) 84.813,82.369 cw(c84.813,83.697) 83.874,82.758 ; 95.073,69.138 cw(c94.134,68.199) 95.462,68.199 ccw(c94.134,68.199) 95.073,69.138 ; 95.073,69.138 ccw(c96.012,70.077) 96.012,68.749 cw(c96.012,70.077) 95.073,69.138
P1_3: P1.4 P1_16.15 | length 30.4
  Top Layer w0.4: P1.4@84.813,84.359 89.129,80.043 89.129,68.851 92.321,65.659 ; P1_16.15@93.472,65.659 92.321,65.659 ; 85.752,83.42 cw(c86.691,84.359) 85.363,84.359 ccw(c86.691,84.359) 85.752,83.42 ; 85.752,83.42 ccw(c84.813,82.481) 84.813,83.809 cw(c84.813,82.481) 85.752,83.42 ; 92.321,65.659 cw(c92.321,64.73) 93.044,65.313 ccw(c92.321,64.73) 92.321,65.659 ; 92.321,65.659 ccw(c92.321,66.588) 93.044,66.005 cw(c92.321,66.588) 92.321,65.659
P1_4: P1.5 P1_16.16 | length 35.4
  Top Layer w0.4: P1.5@84.813,86.899 91.722,79.99 91.722,68.019 92.71,67.031 94.64,67.031 P1_16.16@96.012,65.659 ; 85.752,85.96 cw(c86.691,86.899) 85.363,86.899 ccw(c86.691,86.899) 85.752,85.96 ; 85.752,85.96 ccw(c84.813,85.021) 84.813,86.349 cw(c84.813,85.021) 85.752,85.96 ; 95.073,66.598 cw(c94.134,65.659) 95.462,65.659 ccw(c94.134,65.659) 95.073,66.598 ; 95.073,66.598 ccw(c96.012,67.537) 96.012,66.209 cw(c96.012,67.537) 95.073,66.598
P1_5: P1.6 P17_32.1 | length 54.3
  Top Layer w0.4: P1.6@84.813,89.439 83.622,89.439 ; P17_32.1@101.219,58.039 94.348,58.039 87.617,64.77 83.947,64.77 82.906,65.811 82.906,88.722 83.622,89.439 ; 83.622,89.439 cw(c83.622,88.425) 84.394,89.082 ccw(c83.622,88.425) 83.622,89.439 ; 83.622,89.439 ccw(c83.622,90.453) 84.394,89.796 cw(c83.622,90.453) 83.622,89.439 ; 99.891,58.039 cw(c99.891,56.711) 100.83,57.65 ccw(c99.891,56.711) 99.891,58.039 ; 99.891,58.039 ccw(c99.891,59.367) 100.83,58.428 cw(c99.891,59.367) 99.891,58.039
P1_6: P1.7 P17_32.2 | length 52.9
  Top Layer w0.4: v1(99.517,75.921) 99.517,62.281 P17_32.2@101.219,60.579 ; 99.517,75.438 cw(c100,75.438) 99.659,75.779 ccw(c100,75.438) 99.517,75.438 ; 99.517,75.438 ccw(c99.034,75.438) 99.376,75.779 cw(c99.034,75.438) 99.517,75.438 ; 100.28,61.518 cw(c99.341,60.579) 100.669,60.579 ccw(c99.341,60.579) 100.28,61.518 ; 100.28,61.518 ccw(c101.219,62.457) 101.219,61.129 cw(c101.219,62.457) 100.28,61.518
  Bottom Layer w0.4: P1.7@84.813,91.979 91.653,85.139 91.653,78.105 92.567,77.191 98.247,77.191 v1(99.517,75.921) ; 85.752,91.04 cw(c86.691,91.979) 85.363,91.979 ccw(c86.691,91.979) 85.752,91.04 ; 85.752,91.04 ccw(c84.813,90.101) 84.813,91.429 cw(c84.813,90.101) 85.752,91.04 ; 99.176,76.262 cw(c98.834,75.921) 99.317,75.921 ccw(c98.834,75.921) 99.176,76.262 ; 99.176,76.262 ccw(c99.517,76.603) 99.517,76.121 cw(c99.517,76.603) 99.176,76.262
P1_7: P1.8 P17_32.3 | length 68.1
  Top Layer w0.4: P1.8@84.813,94.519 82.306,92.012 82.306,58.69 83.718,57.277 95.072,57.277 95.758,56.591 102.311,56.591 P17_32.3@103.759,58.039 ; 83.874,93.58 cw(c84.813,92.641) 84.813,93.969 ccw(c84.813,92.641) 83.874,93.58 ; 83.874,93.58 ccw(c82.935,94.519) 84.263,94.519 cw(c82.935,94.519) 83.874,93.58 ; 102.82,57.1 cw(c103.759,56.161) 103.759,57.489 ccw(c103.759,56.161) 102.82,57.1 ; 102.82,57.1 ccw(c101.881,58.039) 103.209,58.039 cw(c101.881,58.039) 102.82,57.1
P2_0: P2.1 P17_32.4 | length 34.5
  Top Layer w0.4: P2.1@84.685,53.455 102.121,53.455 104.927,56.261 104.927,59.411 P17_32.4@103.759,60.579 ; 86.013,53.455 cw(c86.013,54.783) 85.074,53.844 ccw(c86.013,54.783) 86.013,53.455 ; 86.013,53.455 ccw(c86.013,52.127) 85.074,53.066 cw(c86.013,52.127) 86.013,53.455 ; 104.698,59.64 cw(c105.637,60.579) 104.309,60.579 ccw(c105.637,60.579) 104.698,59.64 ; 104.698,59.64 ccw(c103.759,58.701) 103.759,60.029 cw(c103.759,58.701) 104.698,59.64
P2_1: P2.2 P17_32.5 | length 30.8
  Bottom Layer w0.4: P2.2@84.685,55.995 104.255,55.995 P17_32.5@106.299,58.039 ; 86.013,55.995 cw(c86.013,57.323) 85.074,56.384 ccw(c86.013,57.323) 86.013,55.995 ; 86.013,55.995 ccw(c86.013,54.667) 85.074,55.606 cw(c86.013,54.667) 86.013,55.995 ; 105.36,57.1 cw(c106.299,56.161) 106.299,57.489 ccw(c106.299,56.161) 105.36,57.1 ; 105.36,57.1 ccw(c104.421,58.039) 105.749,58.039 cw(c104.421,58.039) 105.36,57.1
P2_2: P2.3 P17_32.6 | length 29.7
  Bottom Layer w0.4: P2.3@84.685,58.535 85.459,59.309 ; P17_32.6@106.299,60.579 105.029,59.309 85.459,59.309 ; 85.459,59.309 cw(c84.883,59.885) 84.765,59.079 ccw(c84.883,59.885) 85.459,59.309 ; 85.459,59.309 ccw(c86.035,58.733) 85.229,58.615 cw(c86.035,58.733) 85.459,59.309 ; 105.36,59.64 cw(c106.299,58.701) 106.299,60.029 ccw(c106.299,58.701) 105.36,59.64 ; 105.36,59.64 ccw(c104.421,60.579) 105.749,60.579 cw(c104.421,60.579) 105.36,59.64
P2_3: P2.4 P17_32.7 | length 45.7
  Bottom Layer w0.4: P2.4@84.685,61.075 85.339,61.729 107.181,61.729 107.569,61.341 107.569,59.309 P17_32.7@108.839,58.039 ; 85.339,61.729 cw(c84.984,62.084) 84.841,61.602 ccw(c84.984,62.084) 85.339,61.729 ; 85.339,61.729 ccw(c85.694,61.374) 85.212,61.231 cw(c85.694,61.374) 85.339,61.729 ; 107.9,58.978 cw(c106.961,58.039) 108.289,58.039 ccw(c106.961,58.039) 107.9,58.978 ; 107.9,58.978 ccw(c108.839,59.917) 108.839,58.589 cw(c108.839,59.917) 107.9,58.978 ; P2.4@84.508,61.252 cw(c85.66,60.1) 85.66,61.729 ccw(c85.66,60.1) P2.4@84.508,61.252 ; P2.4@84.791,60.969 cw(c86.626,59.134) 86.626,61.729 ccw(c86.626,59.134) P2.4@84.791,60.969 ; P2.4@85.074,60.686 cw(c87.592,58.168) 87.592,61.729 ccw(c87.592,58.168) P2.4@85.074,60.686
P2_4: P2.5 P17_32.8 | length 31.1
  Bottom Layer w0.4: P2.5@84.685,63.615 106.283,63.615 108.303,61.595 108.303,61.115 ; P17_32.8@108.839,60.579 108.303,61.115 ; 86.013,63.615 cw(c86.013,64.943) 85.074,64.004 ccw(c86.013,64.943) 86.013,63.615 ; 86.013,63.615 ccw(c86.013,62.287) 85.074,63.226 cw(c86.013,62.287) 86.013,63.615 ; 108.303,61.115 cw(c108.129,60.94) 108.349,60.828 ccw(c108.129,60.94) 108.303,61.115 ; 108.303,61.115 ccw(c108.478,61.289) 108.59,61.069 cw(c108.478,61.289) 108.303,61.115
P2_5: P2.6 P17_32.9 | length 51.3
  Top Layer w0.4: P17_32.9@111.379,58.039 112.649,59.309 112.649,67.259 v1(111.811,68.097) ; 112.152,67.756 cw(c112.494,68.097) 112.011,68.097 ccw(c112.494,68.097) 112.152,67.756 ; 112.152,67.756 ccw(c111.811,67.415) 111.811,67.897 cw(c111.811,67.415) 112.152,67.756 ; 112.318,58.978 cw(c111.379,59.917) 111.379,58.589 ccw(c111.379,59.917) 112.318,58.978 ; 112.318,58.978 ccw(c113.257,58.039) 111.929,58.039 cw(c113.257,58.039) 112.318,58.978
  Bottom Layer w0.4: P2.6@84.685,66.155 87.897,69.367 110.541,69.367 v1(111.811,68.097) ; 85.624,67.094 cw(c84.685,68.033) 84.685,66.705 ccw(c84.685,68.033) 85.624,67.094 ; 85.624,67.094 ccw(c86.563,66.155) 85.235,66.155 cw(c86.563,66.155) 85.624,67.094 ; 111.469,68.439 cw(c111.128,68.097) 111.611,68.097 ccw(c111.128,68.097) 111.469,68.439 ; 111.469,68.439 ccw(c111.811,68.78) 111.811,68.297 cw(c111.811,68.78) 111.469,68.439
P2_6: P2.7 P17_32.10 | length 45.1
  Top Layer w0.4: P2.7@84.685,68.695 93.951,59.429 101.917,59.429 102.387,59.899 102.387,60.96 106.642,65.214 108.948,65.214 111.379,62.783 P17_32.10@111.379,60.579 ; 85.624,67.756 cw(c86.563,68.695) 85.235,68.695 ccw(c86.563,68.695) 85.624,67.756 ; 85.624,67.756 ccw(c84.685,66.817) 84.685,68.145 cw(c84.685,66.817) 85.624,67.756 ; 111.379,61.907 cw(c110.051,61.907) 110.99,60.968 ccw(c110.051,61.907) 111.379,61.907 ; 111.379,61.907 ccw(c112.707,61.907) 111.768,60.968 cw(c112.707,61.907) 111.379,61.907
P2_7: P2.8 P17_32.11 | length 67.7
  Top Layer w0.4: P2.8@84.685,71.235 85.585,71.235 ; v1(90.348,66.472) 85.585,71.235 ; v1(107.671,64.414) 107.671,59.69 108.052,59.309 109.22,59.309 110.109,58.42 110.109,57.633 111.227,56.515 112.395,56.515 P17_32.11@113.919,58.039 ; 85.585,71.235 cw(c85.585,71.696) 85.175,71.486 ccw(c85.585,71.696) 85.585,71.235 ; 85.585,71.235 ccw(c85.585,70.774) 85.175,70.984 cw(c85.585,70.774) 85.585,71.235 ; 90.006,66.813 cw(c89.665,66.472) 90.148,66.472 ccw(c89.665,66.472) 90.006,66.813 ; 90.006,66.813 ccw(c90.348,67.155) 90.348,66.672 cw(c90.348,67.155) 90.006,66.813 ; 107.671,63.932 cw(c108.153,63.932) 107.812,64.273 ccw(c108.153,63.932) 107.671,63.932 ; 107.671,63.932 ccw(c107.188,63.932) 107.529,64.273 cw(c107.188,63.932) 107.671,63.932 ; 112.98,57.1 cw(c113.919,56.161) 113.919,57.489 ccw(c113.919,56.161) 112.98,57.1 ; 112.98,57.1 ccw(c112.041,58.039) 113.369,58.039 cw(c112.041,58.039) 112.98,57.1 ; P2.8@84.685,70.685 cw(c84.685,67.185) 87.16,69.66 ccw(c84.685,67.185) P2.8@84.685,70.685 ; P2.8@84.685,71.085 cw(c84.685,68.551) 86.477,70.343 ccw(c84.685,68.551) P2.8@84.685,71.085 ; P2.8@84.685,71.485 cw(c84.685,69.917) 85.794,71.026 ccw(c84.685,69.917) P2.8@84.685,71.485 ; P2.8@84.783,71.122 cw(c85.239,70.597) 85.731,71.089 ccw(c85.239,70.597) P2.8@84.783,71.122 ; P2.8@85.046,70.82 cw(c85.522,70.272) 86.034,70.785 ccw(c85.522,70.272) P2.8@85.046,70.82
  Bottom Layer w0.4: v1(90.348,66.472) 92.405,64.414 v1(107.671,64.414) ; 90.689,66.13 cw(c91.031,66.472) 90.548,66.472 ccw(c91.031,66.472) 90.689,66.13 ; 90.689,66.13 ccw(c90.348,65.789) 90.348,66.272 cw(c90.348,65.789) 90.689,66.13 ; 107.188,64.414 cw(c107.188,63.932) 107.529,64.273 ccw(c107.188,63.932) 107.188,64.414 ; 107.188,64.414 ccw(c107.188,64.897) 107.529,64.556 cw(c107.188,64.897) 107.188,64.414